# EAGLE board wire F (EAGLE 6.1)
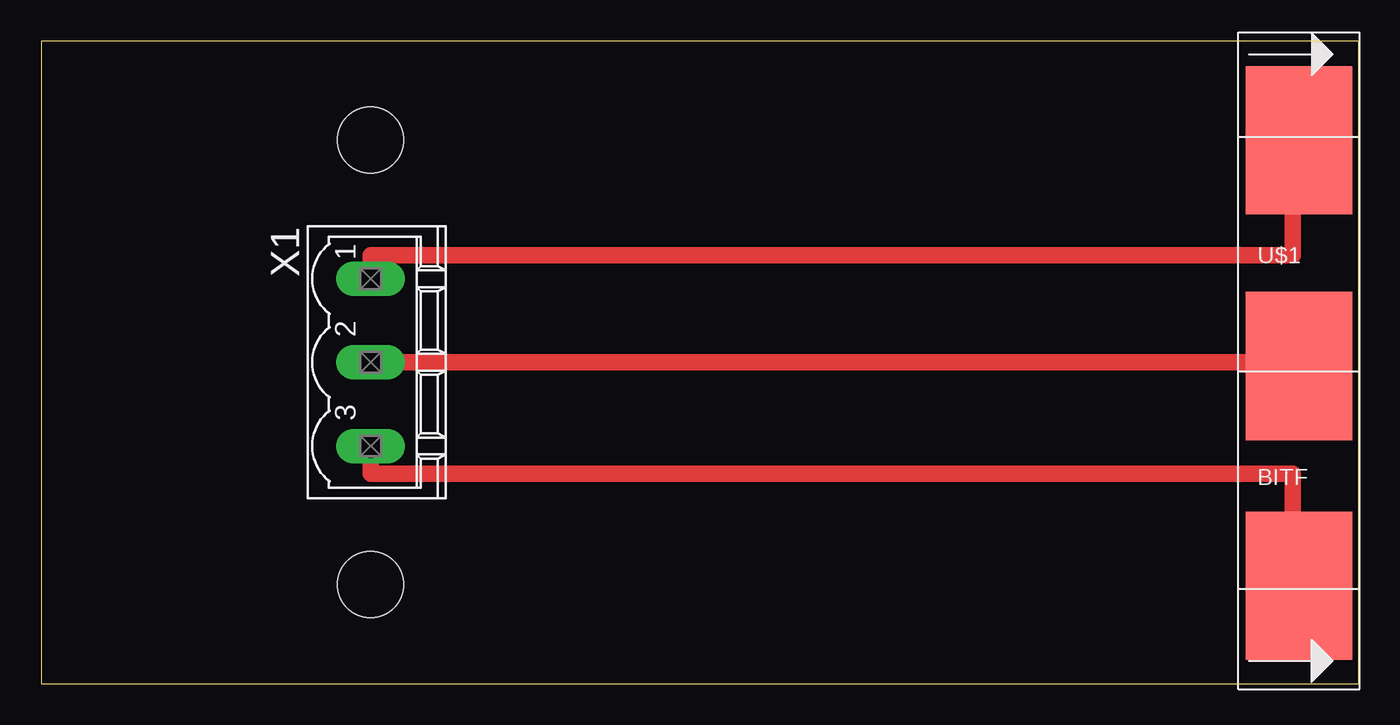
[diagram p0: board, top side]

Size 80 x 39 mm. Coordinates in mm from the lower left corner, seen from the top.
Outline: 0,0 80,0 80,39 0,39 0,0
Copper layers (1*16): Top 0.035mm / dielectric 1.5mm / Bottom 0.035mm
Design rules: minimum track width 10mil, minimum drill 24mil, track to track 8mil, track to pad 8mil, pad to pad 8mil, via to via 8mil, smd to smd 8mil, copper to edge 40mil, drill to drill 8mil, minimum pad ring 10mil, minimum via ring 8mil, stop-mask expansion 4mil, vias tented up to drill 0mil, thermal gap 10mil
Holes 4 mm at 20,33 20,6

## Footprints (pad centres in the part's own frame; a part is rotated, then mirrored left to right if it is on the bottom)
BITM = smd 6.452 x 8.992: GND 3.81,-13.145; SIG 3.81,0.191; VCC 3.81,13.906
MSTBV3 = drill 1.397 long: 1 -5.08,0; 2 0,0; 3 5.08,0

## Placement (x,y rotation side)
U$1  BITF  [BITM]  72.56,19.09 0 top
X1  MSTBV3  [MSTBV3]  20,19.5 270 top

## Library data of the parts
U$1 = _Rada
X1 = con-phoenix-508; MPN: MSTBV 2,5/3-GF-5.08; OC_FARNELL: 1792793; OC_NEWARK: 69R9846

## Nets
N$1: U$1.VCC X1.1
N$2: U$1.SIG X1.2
N$3: U$1.GND X1.3

## Tracks (layer width: path | path; a pad name or v marks a point on that pad's centre or on a via)
N$1
  Top 1: U$1.VCC 76,33 76,26 20,26 X1.1
N$2
  Top 0.406: 76,19.5 76,19 76.37,19 U$1.SIG
  Top 1: X1.2 76,19.5
N$3
  Top 1: U$1.GND 76,5.95 76,12.75 20,12.75 X1.3